# Altium PCB ecen201_blank_pcb.PcbDoc
Units mm, origin at the board's own origin, x right, y up, seen from the top; angles counter-clockwise.
Board outline 55.88 x 55.88 mm, 2 copper layers (Top Layer, Bottom Layer); 28 components, 38 nets, 111 pads, 0 vias.
Unrouted connection lines stored in the file: 1.
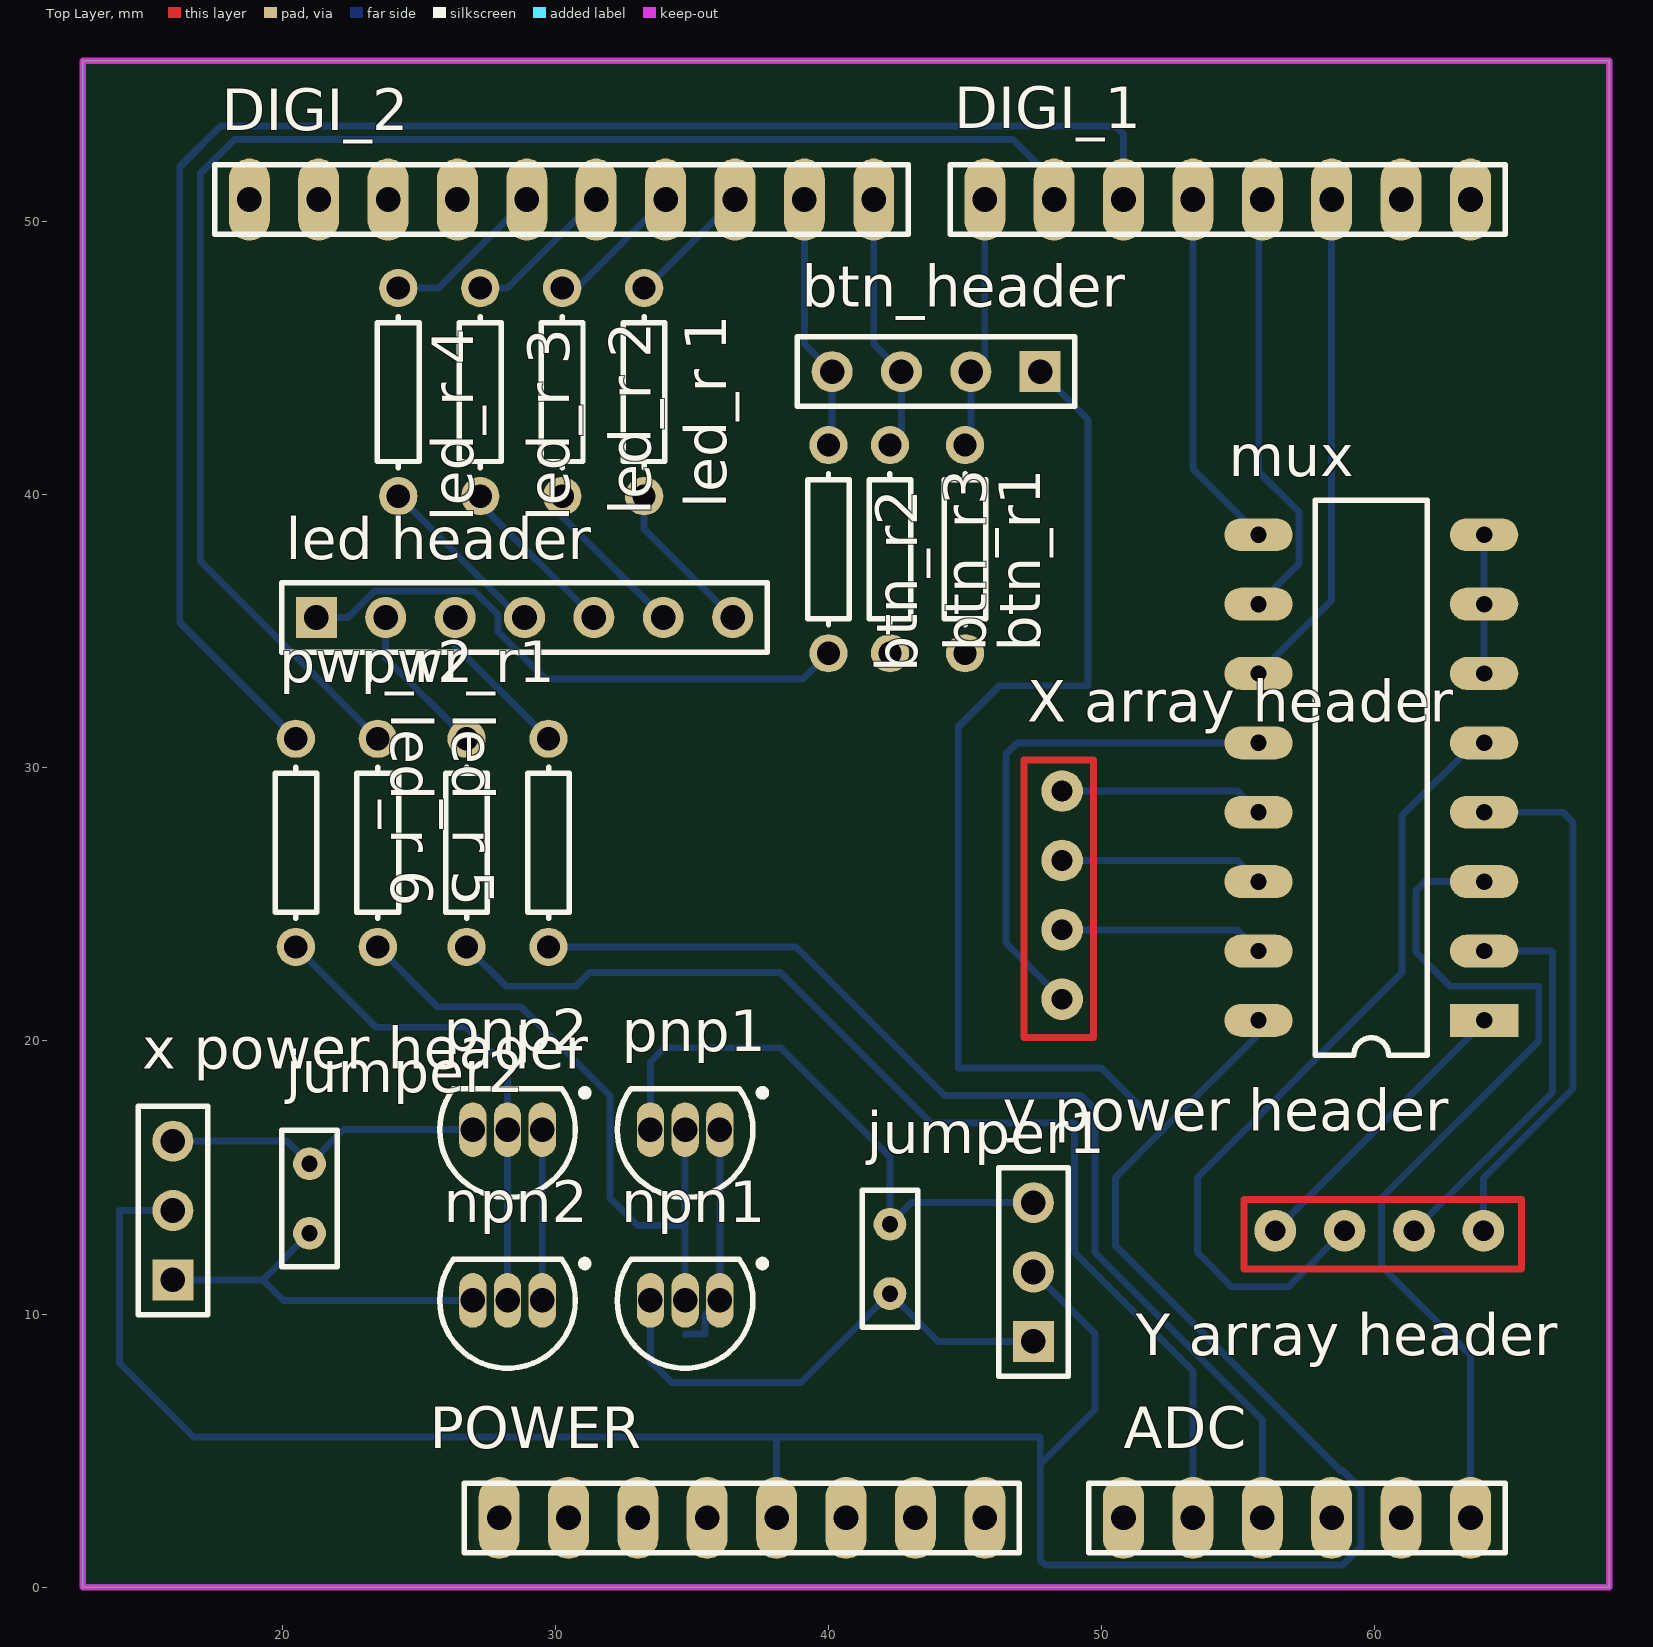
[diagram p0: Top Layer view]
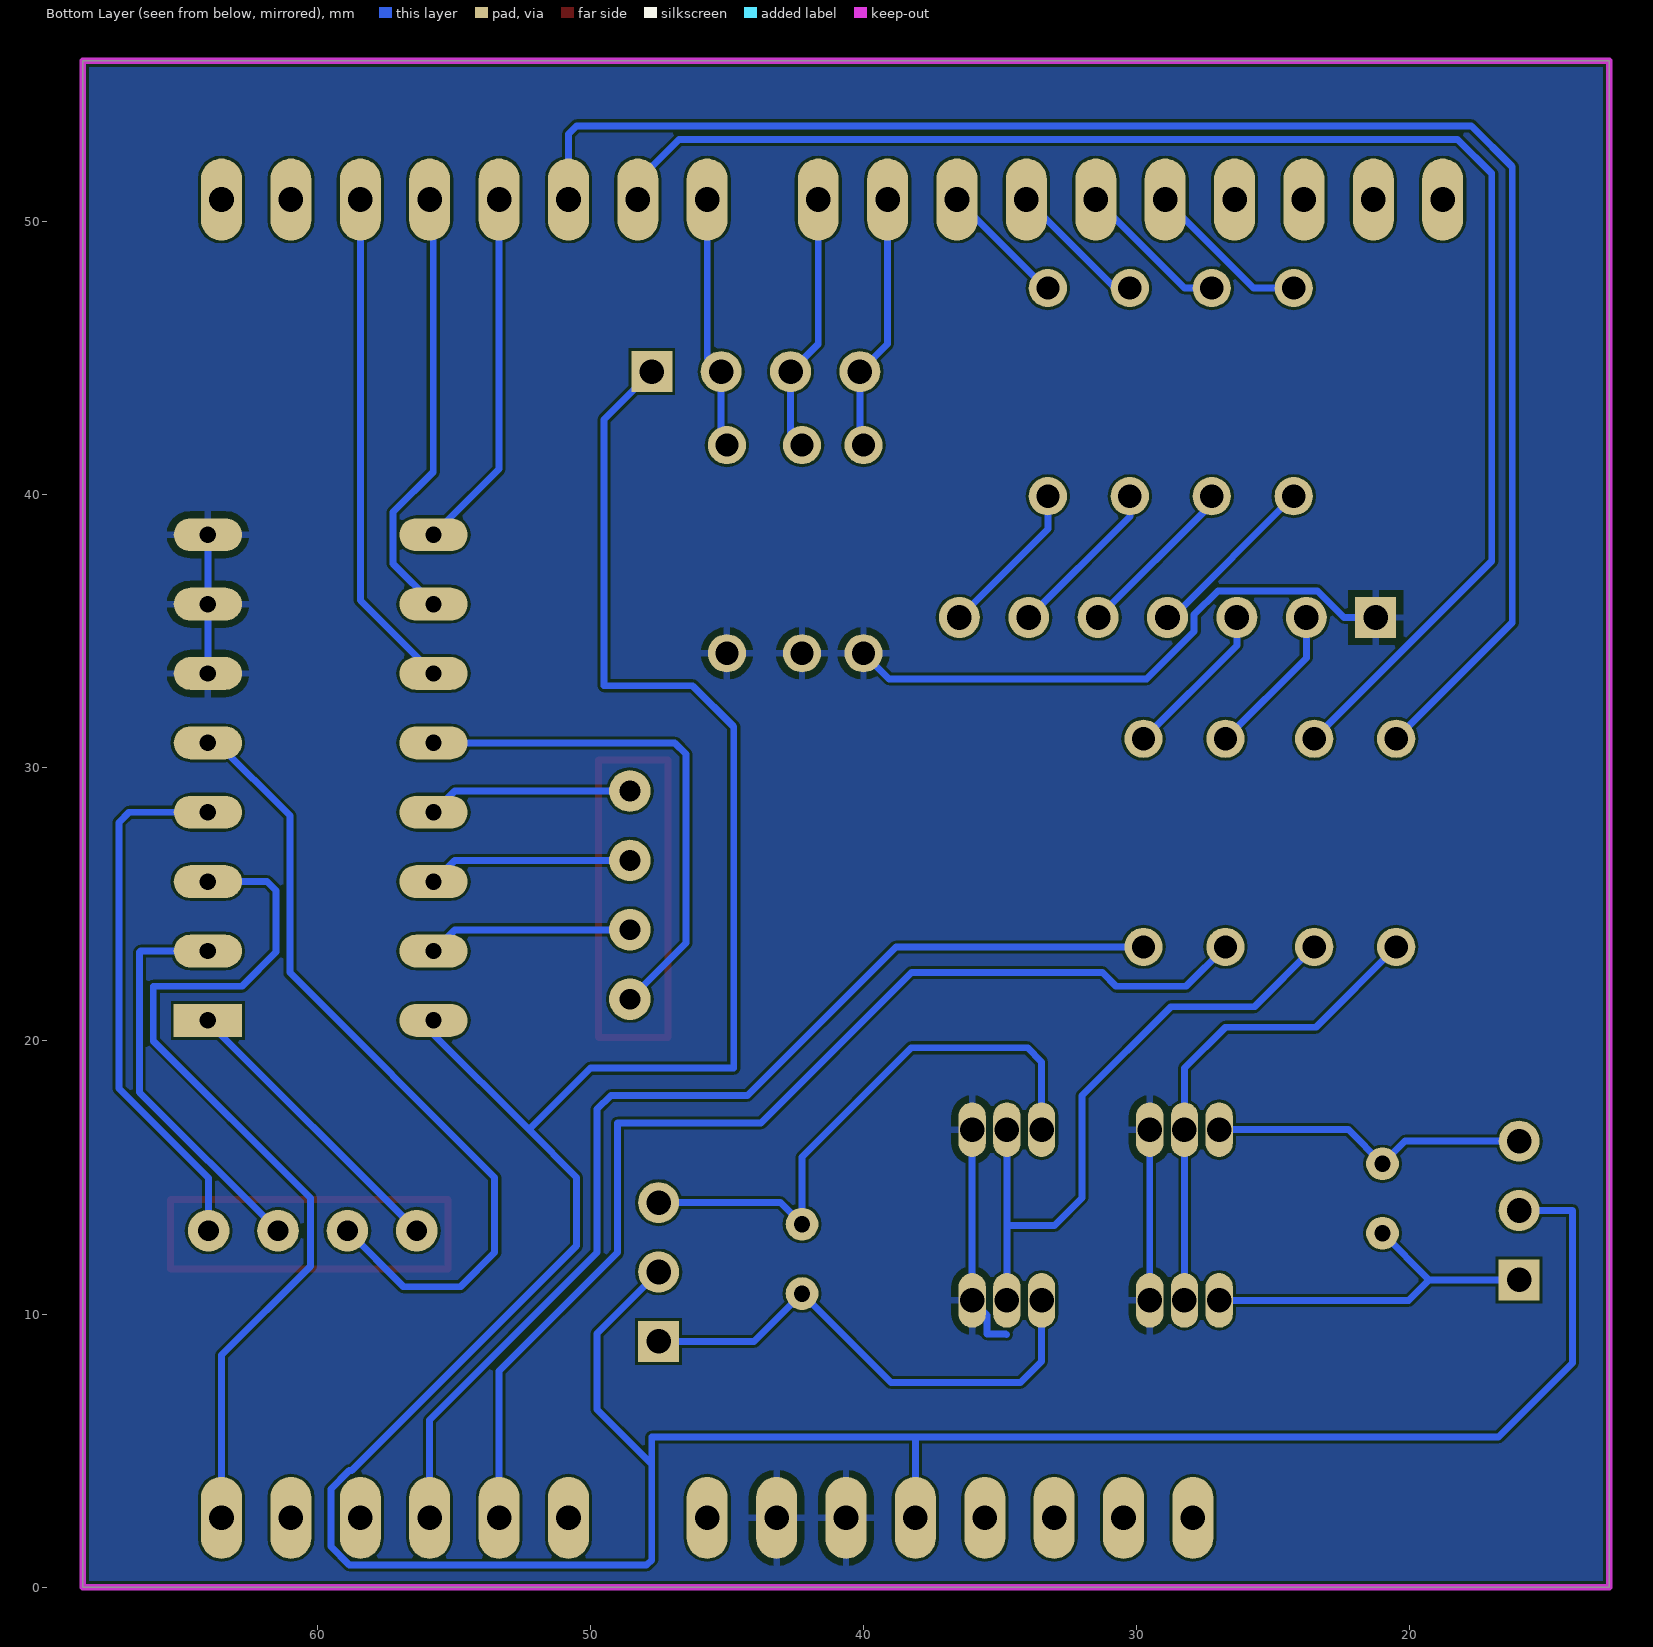
[diagram p1: Bottom Layer view, seen from below]

## Layer stack, top to bottom
Top Solder: solder mask 0.0102, Solder Resist, Dk 3.5
Top Layer: signal copper 0.0356
Dielectric 1: dielectric 0.32, FR-4, Dk 4.8
Bottom Layer: signal copper 0.0356
Bottom Solder: solder mask 0.0102, Solder Resist, Dk 3.5

## Board outline
12.7,0 68.58,0 68.58,55.88 12.7,55.88

## Design rules (kind name [scope] priority, off if disabled: settings)
Clearance [All] p1: gap=0.1
ComponentClearance [All] p1: gap=0.2 collisioncheckmode=3 verticalgap=0.254 showdistances=FALSE
HoleToHoleClearance [All] p1: gap=0.1 allowstackedmicrovias=TRUE
PolygonConnect [All] p1: connectstyle=Relief reliefconductorwidth=0.254 reliefentries=4 polygonreliefangle="90 Angle" airgapwidth=0.254
RoutingVias [All] p1: holewidth=0.711 width=1.27 viastyle="Through Hole" minholewidth=0.711 minwidth=1.27 maxholewidth=0.711 maxwidth=1.27
SilkToSolderMaskClearance [IsPad] p1 off: minsilkscreentomaskgap=0.254 clearancetoexposedcopper=TRUE
SolderMaskExpansion [All] p1: expansion=0.102
UnpouredPolygon [All] p1: allowunpoured=FALSE
Width [All] p1: maxlimit=0.254 minlimit=0.254 preferedwidth=0.254
26 further rules are at their usual default settings.

## Components (designator, comment, footprint, x,y, rotation, side; value= is the part's Value field where it differs from the comment)
ADC "Header 6" HDR1X6 63.5,2.54 r180 top locked
btn_header "Header 4" HDR1X4 47.75,44.5 r180 top
btn_r1 "Res1" AXIAL-0.3 45,38 r90 top
btn_r2 "Res1" AXIAL-0.3 40,38 r90 top
btn_r3 "Res1" AXIAL-0.3 42.25,38 r90 top
DIGI_1 "Header 8" HDR1X8 63.5,50.8 r180 top locked
DIGI_2 "Header 10" HDR1X10 41.656,50.8 r180 top locked
jumper1 "jumper1" jumper 42.25,10.75 r90 top
jumper2 "jumper2" jumper 21,15.5 r270 top
"led header" "Header 7" HDR1X7 21.25,35.5 r0 top
"led_r 1" "Res1" AXIAL-0.3 33.25,43.75 r90 top
"led_r 2" "Res1" AXIAL-0.3 30.25,43.75 r90 top
"led_r 3" "Res1" AXIAL-0.3 27.25,43.75 r90 top
"led_r 4" "Res1" AXIAL-0.3 24.25,43.75 r90 top
"led_r 5" "Res1" AXIAL-0.3 29.75,27.25 r270 top
"led_r 6" "Res1" AXIAL-0.3 26.75,27.25 r270 top
mux "4051" 4051 64,20.75 r180 top
npn1 "2N3904" TO-92A 34.75,10.5 r90 top
npn2 "2N3904" TO-92A 28.25,10.5 r90 top
pnp1 "2N3906" TO-92A 34.75,16.75 r90 top
pnp2 "2N3906" TO-92A 28.25,16.75 r90 top
POWER "Header 8" HDR1X8 45.72,2.54 r180 top locked
pwr_r1 "Res1" AXIAL-0.3 23.5,27.25 r270 top
pwr_r2 "Res1" AXIAL-0.3 20.5,27.25 r270 top
"X array header" "Array header" "ARRAY HEADER" 45.25,27.75 r270 top
"x power header" "Header 3" HDR1X3 16,11.25 r90 top
"Y array header" "Array header" "ARRAY HEADER" 57.75,9.75 r0 top
"y power header" "Header 3" HDR1X3 47.5,9 r90 top

## Footprints (in the part's own frame and the unit in brackets; to place one, negate y for a bottom-side part, rotate by r counter-clockwise, add the part's x,y. Pads: shape width x height; smd on the part's side, far side on the other; paste and mask are expansions set on the pad)
4051 [mm]
  rect 2.5x1.2 hole 0.6: 1(0,0)
  oval 2.5x1.2 hole 0.6: 2(0,-2.54) 3(0,-5.08) 4(0,-7.62) 5(0,-10.16) 6(0,-12.7) 7(0,-15.24) 8(0,-17.78) 9(8.26,-17.78) 10(8.26,-15.24) 11(8.26,-12.7) 12(8.26,-10.16) 13(8.26,-7.62) 14(8.26,-5.08) 15(8.26,-2.54) 16(8.26,0)
  silkscreen extent 2.08,-19.05 6.18,1.27
"ARRAY HEADER" [mil]
  round 60 hole 30: 1(-55,130) 2(45,130) 3(145,130) 4(245,130)
  Top Layer lines w10: 300,75 -100,75 -100,175 300,175 300,75
AXIAL-0.3 [mm] "Axial Device, Thru-Hole; 2 Leads; 0.3 in Pin Spacing"
  round 1.4 hole 0.85: 1(-3.81,0) 2(3.81,0)
  silkscreen extent -2.77,-0.76 2.77,0.76
HDR1X3 [mm] "Connector; Header; 3 Position"
  rect 1.5x1.5 hole 0.9: 1(0,0)
  round 1.5 hole 0.9: 2(2.54,0) 3(5.08,0)
  silkscreen extent -1.27,-1.27 6.35,1.27
HDR1X4 [mm] "Connector; Header; 4 Position"
  rect 1.5x1.5 hole 0.9: 1(0,0)
  round 1.5 hole 0.9: 2(2.54,0) 3(5.08,0) 4(7.62,0)
  silkscreen extent -1.27,-1.27 8.89,1.27
HDR1X6 [mm] "Connector; Header; 6 Position"
  oval 1.5x3 hole 0.9: 1(0,0) 2(2.54,0) 3(5.08,0) 4(7.62,0) 5(10.16,0) 6(12.7,0)
  silkscreen extent -1.27,-1.27 13.97,1.27
HDR1X7 [mm] "Connector; Header; 7 Position"
  rect 1.5x1.5 hole 0.9: 1(0,0)
  round 1.5 hole 0.9: 2(2.54,0) 3(5.08,0) 4(7.62,0) 5(10.16,0) 6(12.7,0) 7(15.24,0)
  silkscreen extent -1.27,-1.27 16.51,1.27
HDR1X8 [mm] "Connector; Header; 8 Position"
  oval 1.5x3 hole 0.9: 1(0,0) 2(2.54,0) 3(5.08,0) 4(7.62,0) 5(10.16,0) 6(12.7,0) 7(15.24,0) 8(17.78,0)
  silkscreen extent -1.27,-1.27 19.05,1.27
HDR1X10 [mm] "Connector; Header; 10 Position"
  oval 1.5x3 hole 0.9: 1(0,0) 2(2.54,0) 3(5.08,0) 4(7.62,0) 5(10.16,0) 6(12.7,0) 7(15.24,0) 8(17.78,0) 9(20.32,0) 10(22.86,0)
  silkscreen extent -1.27,-1.27 24.13,1.27
jumper [mm]
  round 1.2 hole 0.6: 1(0,0) 2(2.54,0)
  silkscreen extent -1.23,-1.02 3.77,1.02
TO-92A [mm] "TO, Flat Index; 3 In-Line, Axial Leads; Body Dia. 4.5mm; Leads 0.51 x 0.48 mm (max)"
  oval 2x1 hole 0.9: 1(0,-1.27) 2(0,0) 3(0,1.27)
  silkscreen extent -2.48,-2.96 1.5,2.48, body extent -2.5,-2.5 1.5,2.5, height 6.86

## Part data
ADC: "Header, 6-Pin"
btn_header: "Header, 4-Pin"
btn_r1 btn_r2 btn_r3 "led_r 1" "led_r 2" "led_r 3" "led_r 4" "led_r 5" "led_r 6" pwr_r1 pwr_r2: "Resistor"
DIGI_1 POWER: "Header, 8-Pin"
DIGI_2: "Header, 10-Pin"
jumper1 jumper2: library part jumper
"led header": "Header, 7-Pin"
npn1 npn2: "NPN General Purpose Amplifier"
pnp1 pnp2: "PNP General Purpose Amplifier"
"x power header" "y power header": "Header, 3-Pin"

## Nets (pads, with @x,y where several pads share a name; then routed paths per layer and width w, separated by ;. In a path a pad name is that pad's centre, name@x,y a point inside that pad or via, vN(x,y) a via of type N, cw(c..) or ccw(c..) an arc to the next point about the centre after c; other vN are vias at no path point)
"ARRAY1 PWR": DIGI_1.6 pwr_r2.1 | length 60.4
  Bottom Layer w0.254: pwr_r2.1 16.25,35.31 16.25,52 17.75,53.5 50.5,53.5 50.8,53.2 DIGI_1.6
"ARRAY2 PWR": DIGI_1.7 pwr_r1.1 | length 56.5
  Bottom Layer w0.254: pwr_r1.1 17,37.56 17,51.75 18.25,53 46.75,53 48.26,51.49 DIGI_1.7
BTN1: btn_header.2 btn_r1.2 DIGI_1.8 | length 9.3
  Bottom Layer w0.254: btn_r1.2 45.21,42.02 btn_header.2 45.72,45.01 DIGI_1.8
BTN2: btn_header.3 btn_r3.2 DIGI_2.1 | length 9.6
  Bottom Layer w0.254: DIGI_2.1 41.656,45.514 btn_header.3 42.67,42.23 btn_r3.2
BTN3: btn_header.4 btn_r2.2 DIGI_2.2 | length 9.5
  Bottom Layer w0.254: DIGI_2.2 39.116,45.514 btn_header.4 40.13,41.94 btn_r2.2
GND: "led header.1" btn_r1.1 btn_r2.1 btn_r3.1 mux.6 mux.7 mux.8 npn1.1 npn2.1 pnp1.1 pnp2.1 POWER.2 POWER.3 | length 41
  Bottom Layer w0.254: 21.25,35.5 22.408,35.5 23.385,36.477 27.023,36.477 27.893,35.607 27.893,34.988 29.631,33.25 39.06,33.25 btn_r2.1 ; npn2.1 pnp2.1 ; 34.77,9.25 34.793,9.273 35.477,9.273 35.477,9.957 npn1.1 pnp1.1 ; mux.6 mux.7 mux.8
"LED 1": "led_r 1.2" DIGI_2.3 | length 4.7
  Bottom Layer w0.254: 33.25,47.56 33.336,47.56 DIGI_2.3
"LED 2": "led_r 2.2" DIGI_2.4 | length 5.1
  Bottom Layer w0.254: 30.25,47.56 30.796,47.56 DIGI_2.4
"LED 3": "led_r 3.2" DIGI_2.5 | length 5.6
  Bottom Layer w0.254: 27.25,47.56 28.256,47.56 DIGI_2.5
"LED 4": "led_r 4.2" DIGI_2.6 | length 6
  Bottom Layer w0.254: 24.25,47.56 25.716,47.56 DIGI_2.6
"LED 5": "led_r 5.2" ADC.4 | length 40
  Bottom Layer w0.254: 29.75,23.44 38.81,23.44 44.25,18 49.25,18 49.75,17.5 49.75,12.25 55.88,6.12 ADC.4
"LED 6": "led_r 6.2" ADC.5 | length 41.6
  Bottom Layer w0.254: 26.75,23.44 28.19,22 30.75,22 31.25,22.5 38.25,22.5 43.75,17 49,17 49,12.25 53.34,7.91 ADC.5
M5: "Y array header.2" mux.5 | length 30
  Bottom Layer w0.254: 58.893,13.052 56.841,11 54.75,11 53.5,12.25 53.5,15 61,22.5 61,28.251 63.659,30.91 mux.5
"MUX A": DIGI_1.3 mux.11 | length 18.5
  Bottom Layer w0.254: mux.11 58.42,36.13 DIGI_1.3
"MUX B": DIGI_1.4 mux.10 | length 16.1
  Bottom Layer w0.254: mux.10 57.217,37.467 57.217,39.357 55.75,40.824 55.75,50.67 DIGI_1.4
"MUX C": DIGI_1.5 mux.9 | length 13.3
  Bottom Layer w0.254: DIGI_1.5 53.34,40.93 mux.9
"MUX OUT": ADC.1 mux.3 | length 33.1
  Bottom Layer w0.254: ADC.1 63.5,8.5 60.25,11.75 60.25,14.25 66,20 66,22 62.75,22 61.5,23.25 61.5,25.5 61.83,25.83 mux.3
Netjumper1_1: "y power header.1" jumper1.1 npn1.3 | length 18.6
  Bottom Layer w0.254: npn1.3 33.48,8.27 34.25,7.5 39,7.5 jumper1.1 44,9 47.5,9
Netjumper1_2: "y power header.3" jumper1.2 pnp1.3 | length 21.2
  Bottom Layer w0.254: pnp1.3 33.48,19.23 34,19.75 38.25,19.75 42.25,15.75 jumper1.2 43.04,14.08 47.5,14.08
Netjumper2_1: "x power header.3" jumper2.1 pnp2.3 | length 11.8
  Bottom Layer w0.254: 16,16.33 20.17,16.33 jumper2.1 22.25,16.75 pnp2.3
Netjumper2_2: "x power header.1" jumper2.2 npn2.3 | length 13.7
  Bottom Layer w0.254: 16,11.25 19.29,11.25 ; jumper2.2 19.29,11.25 ; npn2.3 20.04,10.5 19.29,11.25
"Netled_r 1_1": "led header.7" "led_r 1.1" | length 5.8
  Bottom Layer w0.254: 33.25,39.94 33.25,38.74 36.49,35.5
"Netled_r 2_1": "led header.6" "led_r 2.1" | length 6
  Bottom Layer w0.254: 30.25,39.94 30.25,39.2 33.95,35.5
"Netled_r 3_1": "led header.5" "led_r 3.1" | length 6.2
  Bottom Layer w0.254: 27.25,39.94 27.25,39.66 31.41,35.5
"Netled_r 4_1": "led header.4" "led_r 4.1" | length 6.5
  Bottom Layer w0.254: 24.25,39.94 28.69,35.5 28.87,35.5
"Netled_r 5_1": "led header.3" "led_r 5.1" | length 6.1
  Bottom Layer w0.254: 26.5,35.33 26.33,35.5 26.33,34.48 29.75,31.06
"Netled_r 6_1": "led header.2" "led_r 6.1" | length 5.7
  Bottom Layer w0.254: 23.79,35.5 23.79,34.02 26.75,31.06
Netmux_1: "Y array header.1" mux.1 | length 10.9
  Bottom Layer w0.254: 56.353,13.052 64,20.699 mux.1
Netmux_2: "Y array header.3" mux.2 | length 14.8
  Bottom Layer w0.254: 61.433,13.052 66.5,18.119 66.5,23.25 66.46,23.29 mux.2
Netmux_4: "Y array header.4" mux.4 | length 19.7
  Bottom Layer w0.254: 63.973,13.052 63.973,14.973 67.25,18.25 67.25,28 66.88,28.37 mux.4
Netmux_12: "X array header.4" mux.12 | length 19.2
  Bottom Layer w0.254: 48.552,21.527 46.5,23.579 46.5,30.5 46.91,30.91 mux.12
Netmux_13: "X array header.1" mux.13 | length 7.5
  Bottom Layer w0.254: 48.552,29.147 54.963,29.147 mux.13
Netmux_14: "X array header.2" mux.14 | length 7.5
  Bottom Layer w0.254: 48.552,26.607 54.963,26.607 mux.14
Netmux_15: "X array header.3" mux.15 | length 7.5
  Bottom Layer w0.254: 48.552,24.067 54.963,24.067 mux.15
Netnpn1_2: npn1.2 pnp1.2 pwr_r1.2 | length 23.9
  Bottom Layer w0.254: pwr_r1.2 25.69,21.25 28.75,21.25 32,18 32,14.25 33,13.25 34.75,13.25 ; npn1.2 34.75,13.25 ; pnp1.2 34.75,13.25
Netnpn2_2: npn2.2 pnp2.2 pwr_r2.2 | length 18.1
  Bottom Layer w0.254: pwr_r2.2 23.44,20.5 26.75,20.5 28.25,19 pnp2.2 npn2.2
NetPOWER_7: POWER.7 POWER.8
VCC: "x power header.2" "y power header.2" btn_header.1 mux.16 POWER.4 | length 134.4
  Bottom Layer w0.254: 16,13.79 14.04,13.79 14.04,8.21 16.75,5.5 47.75,5.5 47.75,4.5 ; POWER.4 38.1,5.4 ; 47.5,11.54 49.75,9.29 49.75,6.5 47.75,4.5 ; btn_header.1 49.5,42.75 49.5,33 46.25,33 44.75,31.5 44.75,19 50,19 52.25,16.75 ; mux.16 55.74,20.24 52.25,16.75 ; 47.75,4.5 47.75,1 47.937,0.813 58.825,0.813 59.5,1.488 59.5,3.592 58.825,4.267 58.733,4.267 50.5,12.5 50.5,15 52.25,16.75
pads on no net: ADC.2 ADC.3 ADC.6 DIGI_1.1 DIGI_1.2 DIGI_2.7 DIGI_2.8 DIGI_2.9 DIGI_2.10 POWER.1 POWER.5 POWER.6
copper on no net: | length 1.3
  Bottom Layer w0.254: 50.8,1.2 50.8,2.54

## Polygon pours and split planes (outlines as drawn)
GND on Bottom Layer "Ground layer" (solid, pour order 2): 12.7,55.88 68.58,55.88 68.58,0.33 68.25,0 12.5,0 12.5,36.5 12.473,51.693

## Keep-outs
Keep-Out Layer:
  the board outline again, w0.254